# EAGLE board gate_boost_stencil (EAGLE 9.3.0)
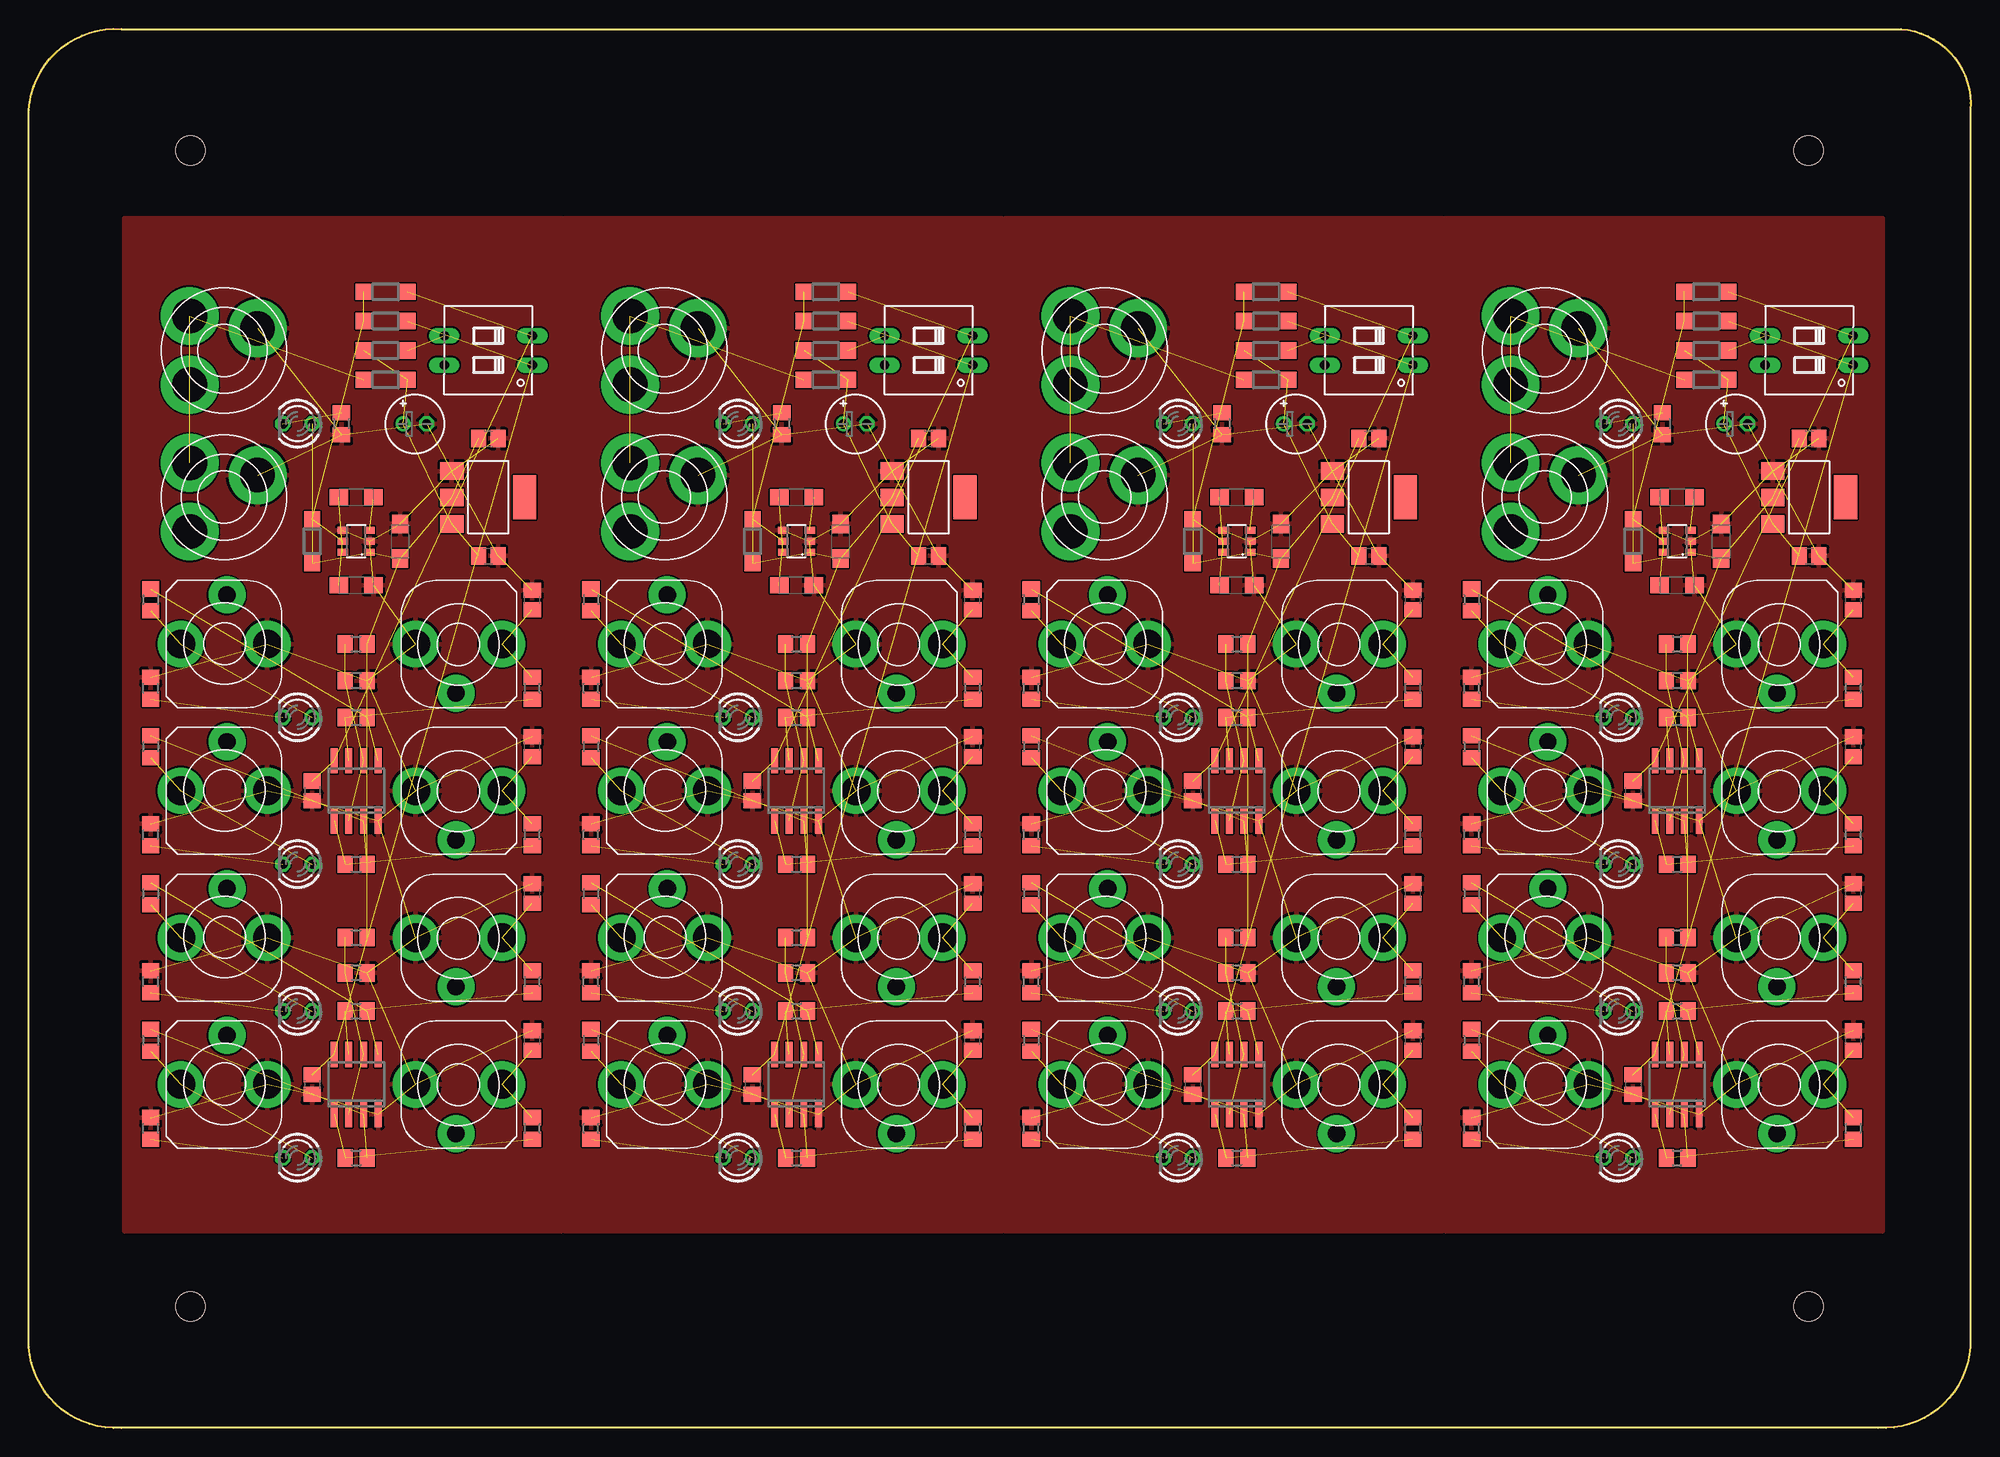
[diagram p0: board, top side]
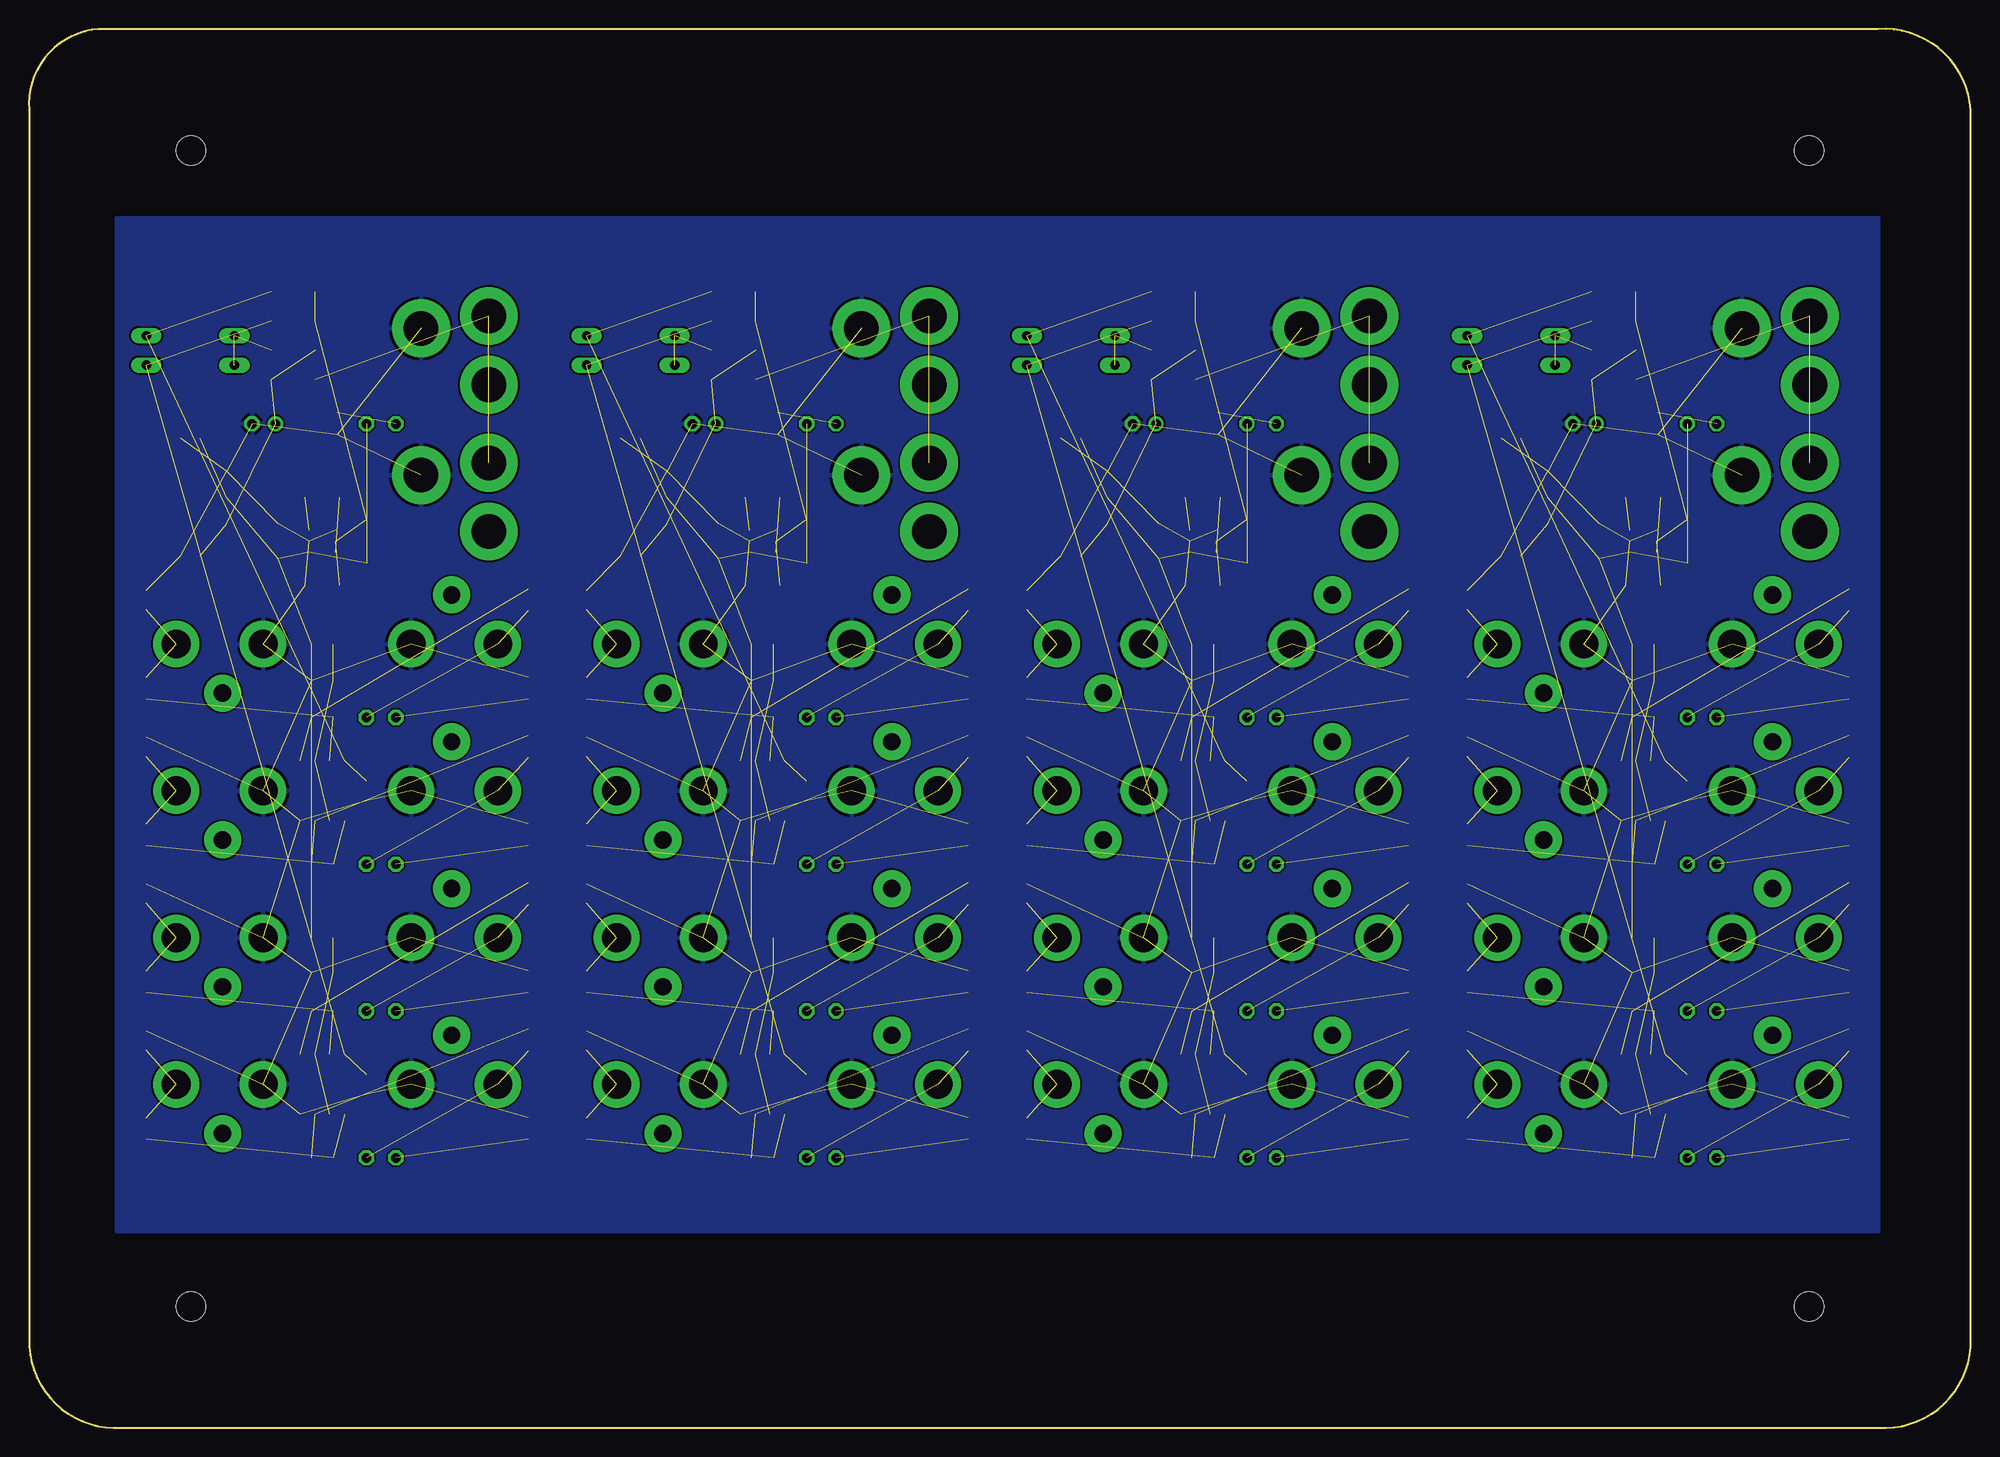
[diagram p1: board, bottom side, seen from below]

Size 168.02 x 121.03 mm. Coordinates in mm from the lower left corner, seen from the top.
Outline: 0,7.01 0,114.01 arc-90 8,121.01 162,121.01 arc-90 168,114.01 168,7.01 arc-90 160,0.01 8,0.01 arc-90 0,7.01
Copper layers (1*16): Top 0.035mm / dielectric 1.5mm / Bottom 0.035mm
Design rules "hackvana": minimum track width 6mil, minimum drill 0.3mm, track to track 6mil, track to pad 9mil, pad to pad 6mil, via to via 6mil, smd to smd 0mil, copper to edge 6mil, drill to drill 6mil, minimum pad ring 10mil, minimum via ring 6mil, stop-mask expansion 2mil, vias tented up to drill 100mil, thermal gap 10mil
Holes 2.54 mm at 14,110.51 14,10.51 154,110.51 154,10.51

## Footprints (pad centres in the part's own frame; a part is rotated, then mirrored left to right if it is on the bottom)
LED3MM = drill 0.813 octagon: A -1.27,0; K 1.27,0
C0805 = smd 1.3 x 1.5: 1 -0.85,0; 2 0.85,0
SMC_A = smd 1.6 x 1.4: + -1.5,0; - 1.5,0
E2-5 = drill 0.813 pad 1.27: + -1.016,0 | drill 0.813 pad 1.27 octagon: - 1.016,0
SOD123 = smd 1.4 x 1.4: A 1.9,0; C -1.9,0
SO08 = smd 0.6 x 2.2: 1 -1.905,-2.6; 2 -0.635,-2.6; 3 0.635,-2.6; 4 1.905,-2.6; 5 1.905,2.6; 6 0.635,2.6; 7 -0.635,2.6; 8 -1.905,2.6
SOT23-6 = smd 0.6 x 0.9: 1 -0.95,-1.15; 2 0,-1.15; 3 0.95,-1.15; 4 0.95,1.15; 5 0,1.15; 6 -0.95,1.15
SOT223 = smd 1.499 x 2.007: 1 -2.261,-3.15; 2 0.025,-3.15; 3 2.311,-3.15 | smd 3.81 x 2.007: 4 0,3.15
VERTICAL_3_5MM_SOCKET = drill 2.5 pad 4: 2 0,-3.75; 4 0,3.75 | drill 1.5 pad 3.2: 3 4.25,-0.25
R0805 = smd 1.3 x 1.5: 1 -0.95,0; 2 0.95,0
DIP02YL = drill 0.813 long: 1 -1.27,-3.81; 2 1.27,-3.81; 3 1.27,3.81; 4 -1.27,3.81
PWR_SOCKET_2_1MM = drill 3 pad 5: BARREL 0,4.2; NC -4.2,0; PIN 3.4,-0.7

## Placement (x,y rotation side)
A  [LED3MM]  23.24,23.36 180 top
A1  [LED3MM]  61.34,23.36 180 top
A2  [LED3MM]  99.44,23.36 180 top
A3  [LED3MM]  137.54,23.36 180 top
B  [LED3MM]  23.24,36.06 180 top
B1  [LED3MM]  61.34,36.06 180 top
B2  [LED3MM]  99.44,36.06 180 top
B3  [LED3MM]  137.54,36.06 180 top
C  [LED3MM]  23.24,48.76 180 top
C1  [C0805]  24.51,29.71 270 top
C2  [C0805]  24.51,55.11 270 top
C3  [C0805]  43.56,33.52 90 top
C4  [C0805]  43.56,46.22 90 top
C5  [C0805]  43.56,58.92 90 top
C6  [C0805]  43.56,71.62 90 top
C7  [C0805]  39.75,75.43 0 top
C8  [C0805]  39.75,85.59 0 top
C9  [SMC_A]  28.32,72.89 0 top
C10  10u  [SMC_A]  32.13,76.7 90 top
C11  10u  [SMC_A]  28.32,80.51 0 top
C12  [E2-5]  33.4,86.86 0 top
C13  [C0805]  81.66,33.52 90 top
C14  [C0805]  81.66,46.22 90 top
C15  10u  [SMC_A]  66.42,80.51 0 top
C16  [SMC_A]  66.42,72.89 0 top
C17  10u  [SMC_A]  70.23,76.7 90 top
C18  [C0805]  62.61,29.71 270 top
C19  [LED3MM]  61.34,48.76 180 top
C20  [C0805]  81.66,58.92 90 top
C21  [C0805]  81.66,71.62 90 top
C22  [C0805]  62.61,55.11 270 top
C23  [E2-5]  71.5,86.86 0 top
C24  [C0805]  77.85,75.43 0 top
C25  [C0805]  77.85,85.59 0 top
C26  [C0805]  119.76,33.52 90 top
C27  [C0805]  119.76,46.22 90 top
C28  10u  [SMC_A]  104.52,80.51 0 top
C29  [SMC_A]  104.52,72.89 0 top
C30  10u  [SMC_A]  108.33,76.7 90 top
C31  [C0805]  100.71,29.71 270 top
C32  [LED3MM]  99.44,48.76 180 top
C33  [C0805]  119.76,58.92 90 top
C34  [C0805]  119.76,71.62 90 top
C35  [C0805]  100.71,55.11 270 top
C36  [E2-5]  109.6,86.86 0 top
C37  [C0805]  115.95,75.43 0 top
C38  [C0805]  115.95,85.59 0 top
C39  [C0805]  157.86,33.52 90 top
C40  [C0805]  157.86,46.22 90 top
C41  10u  [SMC_A]  142.62,80.51 0 top
C42  [SMC_A]  142.62,72.89 0 top
C43  10u  [SMC_A]  146.43,76.7 90 top
C44  [C0805]  138.81,29.71 270 top
C45  [LED3MM]  137.54,48.76 180 top
C46  [C0805]  157.86,58.92 90 top
C47  [C0805]  157.86,71.62 90 top
C48  [C0805]  138.81,55.11 270 top
C49  [E2-5]  147.7,86.86 0 top
C50  [C0805]  154.05,75.43 0 top
C51  [C0805]  154.05,85.59 0 top
D  [LED3MM]  23.24,61.46 180 top
D1  MBR0520LT  [SOD123]  24.51,76.7 270 top
D2  MBR0520LT  [SOD123]  30.86,90.67 180 top
D3  MBR0520LT  [SOD123]  30.86,93.21 180 top
D4  MBR0520LT  [SOD123]  30.86,95.75 180 top
D5  MBR0520LT  [SOD123]  30.86,98.29 180 top
D6  MBR0520LT  [SOD123]  62.61,76.7 270 top
D7  [LED3MM]  61.34,61.46 180 top
D8  MBR0520LT  [SOD123]  68.96,90.67 180 top
D9  MBR0520LT  [SOD123]  68.96,95.75 180 top
D10  MBR0520LT  [SOD123]  68.96,98.29 180 top
D11  MBR0520LT  [SOD123]  68.96,93.21 180 top
D12  MBR0520LT  [SOD123]  100.71,76.7 270 top
D13  [LED3MM]  99.44,61.46 180 top
D14  MBR0520LT  [SOD123]  107.06,90.67 180 top
D15  MBR0520LT  [SOD123]  107.06,95.75 180 top
D16  MBR0520LT  [SOD123]  107.06,98.29 180 top
D17  MBR0520LT  [SOD123]  107.06,93.21 180 top
D18  MBR0520LT  [SOD123]  138.81,76.7 270 top
D19  [LED3MM]  137.54,61.46 180 top
D20  MBR0520LT  [SOD123]  145.16,90.67 180 top
D21  MBR0520LT  [SOD123]  145.16,95.75 180 top
D22  MBR0520LT  [SOD123]  145.16,98.29 180 top
D23  MBR0520LT  [SOD123]  145.16,93.21 180 top
E$4  [STENCILPIN]  14,110.51 0 top
E$5  [STENCILPIN]  154,110.51 0 top
E$6  [STENCILPIN]  154,10.51 0 top
E$7  [STENCILPIN]  14,10.51 0 top
IC1  LM358D  [SO08]  28.32,29.71 0 top
IC2  LM358D  [SO08]  28.32,55.11 0 top
IC3  LM27675M5_CHARGEPUMP  [SOT23-6]  28.32,76.7 90 top
IC4  REG1117  [SOT223]  39.75,80.51 270 top
IC5  LM27675M5_CHARGEPUMP  [SOT23-6]  66.42,76.7 90 top
IC6  LM358D  [SO08]  66.42,29.71 0 top
IC7  LM358D  [SO08]  66.42,55.11 0 top
IC8  REG1117  [SOT223]  77.85,80.51 270 top
IC9  LM27675M5_CHARGEPUMP  [SOT23-6]  104.52,76.7 90 top
IC10  LM358D  [SO08]  104.52,29.71 0 top
IC11  LM358D  [SO08]  104.52,55.11 0 top
IC12  REG1117  [SOT223]  115.95,80.51 270 top
IC13  LM27675M5_CHARGEPUMP  [SOT23-6]  142.62,76.7 90 top
IC14  LM358D  [SO08]  142.62,29.71 0 top
IC15  LM358D  [SO08]  142.62,55.11 0 top
IC16  REG1117  [SOT223]  154.05,80.51 270 top
IN1  VERTICAL_3_5MM_SOCKET  [VERTICAL_3_5MM_SOCKET]  16.89,29.71 90 top
IN2  VERTICAL_3_5MM_SOCKET  [VERTICAL_3_5MM_SOCKET]  16.89,42.41 90 top
IN3  VERTICAL_3_5MM_SOCKET  [VERTICAL_3_5MM_SOCKET]  16.89,55.11 90 top
IN4  VERTICAL_3_5MM_SOCKET  [VERTICAL_3_5MM_SOCKET]  16.89,67.81 90 top
IN5  VERTICAL_3_5MM_SOCKET  [VERTICAL_3_5MM_SOCKET]  54.99,29.71 90 top
IN6  VERTICAL_3_5MM_SOCKET  [VERTICAL_3_5MM_SOCKET]  54.99,42.41 90 top
IN7  VERTICAL_3_5MM_SOCKET  [VERTICAL_3_5MM_SOCKET]  54.99,55.11 90 top
IN8  VERTICAL_3_5MM_SOCKET  [VERTICAL_3_5MM_SOCKET]  54.99,67.81 90 top
IN9  VERTICAL_3_5MM_SOCKET  [VERTICAL_3_5MM_SOCKET]  93.09,29.71 90 top
IN10  VERTICAL_3_5MM_SOCKET  [VERTICAL_3_5MM_SOCKET]  93.09,42.41 90 top
IN11  VERTICAL_3_5MM_SOCKET  [VERTICAL_3_5MM_SOCKET]  93.09,55.11 90 top
IN12  VERTICAL_3_5MM_SOCKET  [VERTICAL_3_5MM_SOCKET]  93.09,67.81 90 top
IN13  VERTICAL_3_5MM_SOCKET  [VERTICAL_3_5MM_SOCKET]  131.19,29.71 90 top
IN14  VERTICAL_3_5MM_SOCKET  [VERTICAL_3_5MM_SOCKET]  131.19,42.41 90 top
IN15  VERTICAL_3_5MM_SOCKET  [VERTICAL_3_5MM_SOCKET]  131.19,55.11 90 top
IN16  VERTICAL_3_5MM_SOCKET  [VERTICAL_3_5MM_SOCKET]  131.19,67.81 90 top
OUT1  VERTICAL_3_5MM_SOCKET  [VERTICAL_3_5MM_SOCKET]  37.21,29.71 270 top
OUT2  VERTICAL_3_5MM_SOCKET  [VERTICAL_3_5MM_SOCKET]  37.21,42.41 270 top
OUT3  VERTICAL_3_5MM_SOCKET  [VERTICAL_3_5MM_SOCKET]  37.21,55.11 270 top
OUT4  VERTICAL_3_5MM_SOCKET  [VERTICAL_3_5MM_SOCKET]  37.21,67.81 270 top
OUT5  VERTICAL_3_5MM_SOCKET  [VERTICAL_3_5MM_SOCKET]  75.31,29.71 270 top
OUT6  VERTICAL_3_5MM_SOCKET  [VERTICAL_3_5MM_SOCKET]  75.31,42.41 270 top
OUT7  VERTICAL_3_5MM_SOCKET  [VERTICAL_3_5MM_SOCKET]  75.31,55.11 270 top
OUT8  VERTICAL_3_5MM_SOCKET  [VERTICAL_3_5MM_SOCKET]  75.31,67.81 270 top
OUT9  VERTICAL_3_5MM_SOCKET  [VERTICAL_3_5MM_SOCKET]  113.41,29.71 270 top
OUT10  VERTICAL_3_5MM_SOCKET  [VERTICAL_3_5MM_SOCKET]  113.41,42.41 270 top
OUT11  VERTICAL_3_5MM_SOCKET  [VERTICAL_3_5MM_SOCKET]  113.41,55.11 270 top
OUT12  VERTICAL_3_5MM_SOCKET  [VERTICAL_3_5MM_SOCKET]  113.41,67.81 270 top
OUT13  VERTICAL_3_5MM_SOCKET  [VERTICAL_3_5MM_SOCKET]  151.51,29.71 270 top
OUT14  VERTICAL_3_5MM_SOCKET  [VERTICAL_3_5MM_SOCKET]  151.51,42.41 270 top
OUT15  VERTICAL_3_5MM_SOCKET  [VERTICAL_3_5MM_SOCKET]  151.51,55.11 270 top
OUT16  VERTICAL_3_5MM_SOCKET  [VERTICAL_3_5MM_SOCKET]  151.51,67.81 270 top
PWR  [LED3MM]  23.24,86.86 180 top
PWR1  [LED3MM]  61.34,86.86 180 top
PWR2  [LED3MM]  99.44,86.86 180 top
PWR3  [LED3MM]  137.54,86.86 180 top
R1  1K  [R0805]  10.54,25.9 90 top
R2  100k  [R0805]  10.54,33.52 270 top
R3  1K  [R0805]  10.54,38.6 90 top
R4  100k  [R0805]  10.54,46.22 270 top
R5  1K  [R0805]  10.54,51.3 90 top
R6  100k  [R0805]  10.54,58.92 270 top
R7  1K  [R0805]  10.54,64 90 top
R8  100k  [R0805]  10.54,71.62 270 top
R9  2m2  [R0805]  28.32,23.36 0 top
R10  2m2  [R0805]  28.32,36.06 0 top
R11  47k  [R0805]  28.32,39.37 180 top
R12  47k  [R0805]  28.32,42.41 0 top
R13  2m2  [R0805]  28.32,48.76 0 top
R14  2m2  [R0805]  28.32,61.46 0 top
R15  47k  [R0805]  28.32,64.64 180 top
R16  47k  [R0805]  28.32,67.81 0 top
R17  1K  [R0805]  27.05,86.86 270 top
R18  1k  [R0805]  43.56,25.9 90 top
R19  1k  [R0805]  43.56,38.6 90 top
R20  1k  [R0805]  43.56,51.3 90 top
R21  1k  [R0805]  43.56,64 90 top
R22  1K  [R0805]  48.64,38.6 90 top
R23  1K  [R0805]  48.64,25.9 90 top
R24  1k  [R0805]  81.66,25.9 90 top
R25  1k  [R0805]  81.66,38.6 90 top
R26  47k  [R0805]  66.42,39.37 180 top
R27  47k  [R0805]  66.42,42.41 0 top
R28  100k  [R0805]  48.64,33.52 270 top
R29  100k  [R0805]  48.64,46.22 270 top
R30  2m2  [R0805]  66.42,36.06 0 top
R31  2m2  [R0805]  66.42,23.36 0 top
R32  1K  [R0805]  48.64,64 90 top
R33  1K  [R0805]  48.64,51.3 90 top
R34  1k  [R0805]  81.66,51.3 90 top
R35  1k  [R0805]  81.66,64 90 top
R36  47k  [R0805]  66.42,64.64 180 top
R37  47k  [R0805]  66.42,67.81 0 top
R38  100k  [R0805]  48.64,58.92 270 top
R39  100k  [R0805]  48.64,71.62 270 top
R40  2m2  [R0805]  66.42,61.46 0 top
R41  2m2  [R0805]  66.42,48.76 0 top
R42  1K  [R0805]  65.15,86.86 270 top
R43  1K  [R0805]  86.74,38.6 90 top
R44  1K  [R0805]  86.74,25.9 90 top
R45  1k  [R0805]  119.76,25.9 90 top
R46  1k  [R0805]  119.76,38.6 90 top
R47  47k  [R0805]  104.52,39.37 180 top
R48  47k  [R0805]  104.52,42.41 0 top
R49  100k  [R0805]  86.74,33.52 270 top
R50  100k  [R0805]  86.74,46.22 270 top
R51  2m2  [R0805]  104.52,36.06 0 top
R52  2m2  [R0805]  104.52,23.36 0 top
R53  1K  [R0805]  86.74,64 90 top
R54  1K  [R0805]  86.74,51.3 90 top
R55  1k  [R0805]  119.76,51.3 90 top
R56  1k  [R0805]  119.76,64 90 top
R57  47k  [R0805]  104.52,64.64 180 top
R58  47k  [R0805]  104.52,67.81 0 top
R59  100k  [R0805]  86.74,58.92 270 top
R60  100k  [R0805]  86.74,71.62 270 top
R61  2m2  [R0805]  104.52,61.46 0 top
R62  2m2  [R0805]  104.52,48.76 0 top
R63  1K  [R0805]  103.25,86.86 270 top
R64  1K  [R0805]  124.84,38.6 90 top
R65  1K  [R0805]  124.84,25.9 90 top
R66  1k  [R0805]  157.86,25.9 90 top
R67  1k  [R0805]  157.86,38.6 90 top
R68  47k  [R0805]  142.62,39.37 180 top
R69  47k  [R0805]  142.62,42.41 0 top
R70  100k  [R0805]  124.84,33.52 270 top
R71  100k  [R0805]  124.84,46.22 270 top
R72  2m2  [R0805]  142.62,36.06 0 top
R73  2m2  [R0805]  142.62,23.36 0 top
R74  1K  [R0805]  124.84,64 90 top
R75  1K  [R0805]  124.84,51.3 90 top
R76  1k  [R0805]  157.86,51.3 90 top
R77  1k  [R0805]  157.86,64 90 top
R78  47k  [R0805]  142.62,64.64 180 top
R79  47k  [R0805]  142.62,67.81 0 top
R80  100k  [R0805]  124.84,58.92 270 top
R81  100k  [R0805]  124.84,71.62 270 top
R82  2m2  [R0805]  142.62,61.46 0 top
R83  2m2  [R0805]  142.62,48.76 0 top
R84  1K  [R0805]  141.35,86.86 270 top
SW1  [DIP02YL]  39.75,93.21 90 top
SW2  [DIP02YL]  77.85,93.21 90 top
SW3  [DIP02YL]  115.95,93.21 90 top
SW4  [DIP02YL]  154.05,93.21 90 top
U$1  PWR_SOCKET_2_1MM  [PWR_SOCKET_2_1MM]  16.89,80.51 45 top
U$2  PWR_SOCKET_2_1MM  [PWR_SOCKET_2_1MM]  16.89,93.21 45 top
U$3  PWR_SOCKET_2_1MM  [PWR_SOCKET_2_1MM]  54.99,80.51 45 top
U$4  PWR_SOCKET_2_1MM  [PWR_SOCKET_2_1MM]  54.99,93.21 45 top
U$5  PWR_SOCKET_2_1MM  [PWR_SOCKET_2_1MM]  93.09,80.51 45 top
U$6  PWR_SOCKET_2_1MM  [PWR_SOCKET_2_1MM]  93.09,93.21 45 top
U$7  PWR_SOCKET_2_1MM  [PWR_SOCKET_2_1MM]  131.19,80.51 45 top
U$8  PWR_SOCKET_2_1MM  [PWR_SOCKET_2_1MM]  131.19,93.21 45 top

## Library data of the parts
A A1-A3 B B1-B3 C C19 C32 C45 D D7 D13 D19 PWR PWR1-PWR3 = led
C1-C8 C13 C14 C18 C20-C22 C24-C27 C31 C33-C35 C37-C40 C44 C46-C48 C50 C51 = resistor
C9-C12 C15-C17 C23 C28-C30 C36 C41-C43 C49 R1-R84 = rcl
D1-D6 D8-D12 D14-D18 D20-D23 = diode
E$4-E$7 = jason_stencil
IC1 IC2 IC6 IC7 IC10 IC11 IC14 IC15 = linear
IC3 IC5 IC9 IC13 IN1-IN16 OUT1-OUT16 U$1-U$8 = jason_eagle6
IC4 IC8 IC12 IC16 = burr-brown; MPN: REG1117; OC_FARNELL: 1097566; OC_NEWARK: 14P6981
SW1-SW4 = switch-dil; OC_FARNELL: unknown; OC_NEWARK: unknown

## Nets
+5V: C8.1 C10.+ D1.A IC3.1 IC4.2 PWR.A R12.2 R16.2
+5V1: C17.+ C25.1 D6.A IC5.1 IC8.2 PWR1.A R27.2 R37.2
+5V2: C30.+ C38.1 D12.A IC9.1 IC12.2 PWR2.A R48.2 R58.2
+5V3: C43.+ C51.1 D18.A IC13.1 IC16.2 PWR3.A R69.2 R79.2
+10V: C9.+ D1.C D4.A D5.A IC3.5
+10V1: C16.+ D6.C D9.A D10.A IC5.5
+10V2: C29.+ D12.C D15.A D16.A IC9.5
+10V3: C42.+ D18.C D21.A D22.A IC13.5
GND: C1.2 C2.2 C3.2 C4.2 C5.2 C6.2 C7.2 C8.2 C9.- C10.- C12.- IC1.4 IC2.4 IC3.2 IC3.4 IC4.1 IN1.2 IN2.2 IN3.2 IN4.2 OUT1.2 OUT2.2 OUT3.2 OUT4.2 R1.2 R3.2 R5.2 R7.2 R11.1 R15.1 R17.2 U$1.PIN U$2.PIN
GND1: C13.2 C14.2 C16.- C17.- C18.2 C20.2 C21.2 C22.2 C23.- C24.2 C25.2 IC5.2 IC5.4 IC6.4 IC7.4 IC8.1 IN5.2 IN6.2 IN7.2 IN8.2 OUT5.2 OUT6.2 OUT7.2 OUT8.2 R22.2 R23.2 R26.1 R32.2 R33.2 R36.1 R42.2 U$3.PIN U$4.PIN
GND2: C26.2 C27.2 C29.- C30.- C31.2 C33.2 C34.2 C35.2 C36.- C37.2 C38.2 IC9.2 IC9.4 IC10.4 IC11.4 IC12.1 IN9.2 IN10.2 IN11.2 IN12.2 OUT9.2 OUT10.2 OUT11.2 OUT12.2 R43.2 R44.2 R47.1 R53.2 R54.2 R57.1 R63.2 U$5.PIN U$6.PIN
GND3: C39.2 C40.2 C42.- C43.- C44.2 C46.2 C47.2 C48.2 C49.- C50.2 C51.2 IC13.2 IC13.4 IC14.4 IC15.4 IC16.1 IN13.2 IN14.2 IN15.2 IN16.2 OUT13.2 OUT14.2 OUT15.2 OUT16.2 R64.2 R65.2 R68.1 R74.2 R75.2 R78.1 R84.2 U$7.PIN U$8.PIN
IN1: A.A IN1.4 R2.2
IN2: B.A IN2.4 R4.2
IN3: C.A IN3.4 R6.2
IN4: D.A IN4.4 R8.2
IN5: C19.A IN7.4 R38.2
IN6: D7.A IN8.4 R39.2
IN7: A1.A IN5.4 R28.2
IN8: B1.A IN6.4 R29.2
IN9: C32.A IN11.4 R59.2
IN10: D13.A IN12.4 R60.2
IN11: A2.A IN9.4 R49.2
IN12: B2.A IN10.4 R50.2
IN13: C45.A IN15.4 R80.2
IN14: D19.A IN16.4 R81.2
IN15: A3.A IN13.4 R70.2
IN16: B3.A IN14.4 R71.2
N$1: IC1.2 IC1.6 R11.2 R12.1
N$2: A.K R1.1
N$3: B.K R3.1
N$4: IC1.3 R2.1 R9.2
N$5: IC1.5 R4.1 R10.2
N$6: D3.C SW1.3 SW1.4
N$7: C5.1 OUT3.4 R20.2
N$8: C6.1 OUT4.4 R21.2
N$9: IC1.1 R9.1 R18.1
N$10: IC2.7 R14.1 R21.1
N$11: IC2.1 R13.1 R20.1
N$12: IC1.7 R10.1 R19.1
N$13: IC2.2 IC2.6 R15.2 R16.1
N$14: C.K R5.1
N$15: D.K R7.1
N$16: IC2.3 R6.1 R13.2
N$17: IC2.5 R8.1 R14.2
N$18: C13.1 OUT5.4 R24.2
N$19: C3.1 OUT1.4 R18.2
N$20: C4.1 OUT2.4 R19.2
N$21: D2.A U$1.BARREL U$2.BARREL
N$22: C14.1 OUT6.4 R25.2
N$23: PWR.K R17.1
N$24: IC6.7 R25.1 R30.1
N$25: IC6.1 R24.1 R31.1
N$26: C15.+ IC5.6
N$27: C15.- IC5.3
N$28: IC6.2 IC6.6 R26.2 R27.1
N$29: A1.K R23.1
N$30: B1.K R22.1
N$31: IC6.3 R28.1 R31.2
N$32: IC6.5 R29.1 R30.2
N$33: C20.1 OUT7.4 R34.2
N$34: C21.1 OUT8.4 R35.2
N$35: IC7.7 R35.1 R40.1
N$36: IC7.1 R34.1 R41.1
N$37: IC7.2 IC7.6 R36.2 R37.1
N$38: C11.+ IC3.6
N$39: C11.- IC3.3
N$40: C19.K R33.1
N$41: D7.K R32.1
N$42: IC7.3 R38.1 R41.2
N$43: IC7.5 R39.1 R40.2
N$44: D8.A U$3.BARREL U$4.BARREL
N$45: PWR1.K R42.1
N$46: D11.C SW2.3 SW2.4
N$47: C26.1 OUT9.4 R45.2
N$48: C27.1 OUT10.4 R46.2
N$49: IC10.7 R46.1 R51.1
N$50: IC10.1 R45.1 R52.1
N$51: C28.+ IC9.6
N$52: C28.- IC9.3
N$53: IC10.2 IC10.6 R47.2 R48.1
N$54: A2.K R44.1
N$55: B2.K R43.1
N$56: IC10.3 R49.1 R52.2
N$57: IC10.5 R50.1 R51.2
N$58: C33.1 OUT11.4 R55.2
N$59: C34.1 OUT12.4 R56.2
N$60: IC11.7 R56.1 R61.1
N$61: IC11.1 R55.1 R62.1
N$62: IC11.2 IC11.6 R57.2 R58.1
N$63: C32.K R54.1
N$64: D13.K R53.1
N$65: IC11.3 R59.1 R62.2
N$66: IC11.5 R60.1 R61.2
N$67: D14.A U$5.BARREL U$6.BARREL
N$68: PWR2.K R63.1
N$69: D17.C SW3.3 SW3.4
N$70: C39.1 OUT13.4 R66.2
N$71: C40.1 OUT14.4 R67.2
N$72: IC14.7 R67.1 R72.1
N$73: IC14.1 R66.1 R73.1
N$74: C41.+ IC13.6
N$75: C41.- IC13.3
N$76: IC14.2 IC14.6 R68.2 R69.1
N$77: A3.K R65.1
N$78: B3.K R64.1
N$79: IC14.3 R70.1 R73.2
N$80: IC14.5 R71.1 R72.2
N$81: C46.1 OUT15.4 R76.2
N$82: C47.1 OUT16.4 R77.2
N$83: IC15.7 R77.1 R82.1
N$84: IC15.1 R76.1 R83.1
N$85: IC15.2 IC15.6 R78.2 R79.1
N$86: C45.K R75.1
N$87: D19.K R74.1
N$88: IC15.3 R80.1 R83.2
N$89: IC15.5 R81.1 R82.2
N$90: D20.A U$7.BARREL U$8.BARREL
N$91: PWR3.K R84.1
N$92: D23.C SW4.3 SW4.4
VGATE1: C1.1 D4.C IC1.8 SW1.1
VGATE2: C2.1 D5.C IC2.8 SW1.2
VGATE3: C22.1 D10.C IC7.8 SW2.2
VGATE4: C18.1 D9.C IC6.8 SW2.1
VGATE5: C35.1 D16.C IC11.8 SW3.2
VGATE6: C31.1 D15.C IC10.8 SW3.1
VGATE7: C48.1 D22.C IC15.8 SW4.2
VGATE8: C44.1 D21.C IC14.8 SW4.1
VIN: C7.1 C12.+ D2.C D3.A IC4.3
VIN1: C23.+ C24.1 D8.C D11.A IC8.3
VIN2: C36.+ C37.1 D14.C D17.A IC12.3
VIN3: C49.+ C50.1 D20.C D23.A IC16.3

## Tracks (layer width: path | path; a pad name or v marks a point on that pad's centre or on a via)
+5V  (7 unrouted)
+5V1  (7 unrouted)
+5V2  (7 unrouted)
+5V3  (7 unrouted)
+10V  (4 unrouted)
+10V1  (4 unrouted)
+10V2  (4 unrouted)
+10V3  (4 unrouted)
GND  (32 unrouted)
  pour Top: 8.25,17.01 46.1,17.01 46.1,104.64 8.25,104.64
  pour Bottom: 8,17.01 46.1,17.01 46.1,104.64 8,104.64
GND1  (32 unrouted)
  pour Top: 46.35,17.01 84.2,17.01 84.2,104.64 46.35,104.64
  pour Bottom: 46.1,17.01 84.2,17.01 84.2,104.64 46.1,104.64
GND2  (32 unrouted)
  pour Top: 84.45,17.01 122.3,17.01 122.3,104.64 84.45,104.64
  pour Bottom: 84.2,17.01 122.3,17.01 122.3,104.64 84.2,104.64
GND3  (32 unrouted)
  pour Top: 122.55,17.01 160.4,17.01 160.4,104.64 122.55,104.64
  pour Bottom: 122.3,17.01 160.4,17.01 160.4,104.64 122.3,104.64
IN1  (2 unrouted)
IN2  (2 unrouted)
IN3  (2 unrouted)
IN4  (2 unrouted)
IN5  (2 unrouted)
IN6  (2 unrouted)
IN7  (2 unrouted)
IN8  (2 unrouted)
IN9  (2 unrouted)
IN10  (2 unrouted)
IN11  (2 unrouted)
IN12  (2 unrouted)
IN13  (2 unrouted)
IN14  (2 unrouted)
IN15  (2 unrouted)
IN16  (2 unrouted)
N$1  (3 unrouted)
N$2  (1 unrouted)
N$3  (1 unrouted)
N$4  (2 unrouted)
N$5  (2 unrouted)
N$6  (2 unrouted)
N$7  (2 unrouted)
N$8  (2 unrouted)
N$9  (2 unrouted)
N$10  (2 unrouted)
N$11  (2 unrouted)
N$12  (2 unrouted)
N$13  (3 unrouted)
N$14  (1 unrouted)
N$15  (1 unrouted)
N$16  (2 unrouted)
N$17  (2 unrouted)
N$18  (2 unrouted)
N$19  (2 unrouted)
N$20  (2 unrouted)
N$21  (2 unrouted)
N$22  (2 unrouted)
N$23  (1 unrouted)
N$24  (2 unrouted)
N$25  (2 unrouted)
N$26  (1 unrouted)
N$27  (1 unrouted)
N$28  (3 unrouted)
N$29  (1 unrouted)
N$30  (1 unrouted)
N$31  (2 unrouted)
N$32  (2 unrouted)
N$33  (2 unrouted)
N$34  (2 unrouted)
N$35  (2 unrouted)
N$36  (2 unrouted)
N$37  (3 unrouted)
N$38  (1 unrouted)
N$39  (1 unrouted)
N$40  (1 unrouted)
N$41  (1 unrouted)
N$42  (2 unrouted)
N$43  (2 unrouted)
N$44  (2 unrouted)
N$45  (1 unrouted)
N$46  (2 unrouted)
N$47  (2 unrouted)
N$48  (2 unrouted)
N$49  (2 unrouted)
N$50  (2 unrouted)
N$51  (1 unrouted)
N$52  (1 unrouted)
N$53  (3 unrouted)
N$54  (1 unrouted)
N$55  (1 unrouted)
N$56  (2 unrouted)
N$57  (2 unrouted)
N$58  (2 unrouted)
N$59  (2 unrouted)
N$60  (2 unrouted)
N$61  (2 unrouted)
N$62  (3 unrouted)
N$63  (1 unrouted)
N$64  (1 unrouted)
N$65  (2 unrouted)
N$66  (2 unrouted)
N$67  (2 unrouted)
N$68  (1 unrouted)
N$69  (2 unrouted)
N$70  (2 unrouted)
N$71  (2 unrouted)
N$72  (2 unrouted)
N$73  (2 unrouted)
N$74  (1 unrouted)
N$75  (1 unrouted)
N$76  (3 unrouted)
N$77  (1 unrouted)
N$78  (1 unrouted)
N$79  (2 unrouted)
N$80  (2 unrouted)
N$81  (2 unrouted)
N$82  (2 unrouted)
N$83  (2 unrouted)
N$84  (2 unrouted)
N$85  (3 unrouted)
N$86  (1 unrouted)
N$87  (1 unrouted)
N$88  (2 unrouted)
N$89  (2 unrouted)
N$90  (2 unrouted)
N$91  (1 unrouted)
N$92  (2 unrouted)
VGATE1  (3 unrouted)
VGATE2  (3 unrouted)
VGATE3  (3 unrouted)
VGATE4  (3 unrouted)
VGATE5  (3 unrouted)
VGATE6  (3 unrouted)
VGATE7  (3 unrouted)
VGATE8  (3 unrouted)
VIN  (4 unrouted)
VIN1  (4 unrouted)
VIN2  (4 unrouted)
VIN3  (4 unrouted)

## Text on the board
tDocu: six4pix.com/cvocd | six4pix.com/cvocd | six4pix.com/cvocd | six4pix.com/cvocd | CV.OCD Gate Boost v2 | CV.OCD Gate Boost v2 | CV.OCD Gate Boost v2 | CV.OCD Gate Boost v2
_tPlace: OUT4 | OUT4 | OUT4 | OUT4 | IN4 | IN4 | IN4 | IN4 | OUT3 | OUT3 | OUT3 | OUT3 | IN3 | IN3 | IN3 | IN3 | OUT2 | OUT2 | OUT2 | OUT2 | IN2 | IN2 | IN2 | IN2 | OUT1 | OUT1 | OUT1 | OUT1 | IN1 | IN1 | IN1 | IN1
_tNames: D5 | D5 | D5 | D5 | D4 | D4 | D4 | D4 | D3 | D3 | D3 | D3 | PWR | PWR | PWR | PWR | D2 | D2 | D2 | D2 | R17 | R17 | R17 | R17 | SW1 | SW1 | SW1 | SW1 | C12 | C8 | C12 | C8 | C12 | C8 | C12 | C8 | C11 | C11 | C11 | C11 | IC3 | IC3 | IC3 | IC3 | D1 | D1 | D1 | D1 | IC4 | IC4 | IC4 | IC4 | C10 | C10 | C10 | C10 | C7 | C7 | C7 | C7 | C9 | C9 | C9 | C9 | R16 | C6 | R16 | C6 | R16 | C6 | R16 | C6 | R8 | R7 | R8 | R7 | R8 | R7 | R8 | R7 | R15 | R15 | R15 | R15 | R21 | R21 | R21 | R21 | R14 | R14 | R14 | R14 | D | D | D | D | C5 | C5 | C5 | C5 | R6 | R5 | R6 | R5 | R6 | R5 | R6 | R5 | C2 | C2 | C2 | C2 | R20 | R20 | R20 | R20 | IC2 | IC2 | IC2 | IC2 | C | R13 | C | R13 | C | R13 | C | R13 | R12 | C4 | R12 | C4 | R12 | C4 | R12 | C4 | R4 | R4 | R4 | R4 | R3 | R3 | R3 | R3 | R19 | R19 | R19 | R19 | R11 | R11 | R11 | R11 | R10 | R10 | R10 | R10 | B | B | B | B | C3 | C3 | C3 | C3 | R2 | R2 | R2 | R2 | R1 | R1 | R1 | R1 | C1 | C1 | C1 | C1 | R18 | R18 | R18 | R18 | IC1 | IC1 | IC1 | IC1 | A | R9 | A | R9 | A | R9 | A | R9